# EAGLE board Open Ephys EIB Omnetics 2x32 3 fibers large gold pins (EAGLE 6.3)
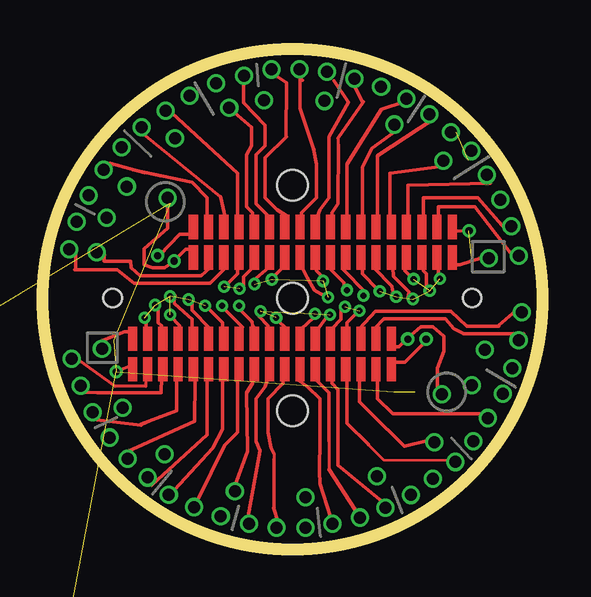
[diagram p0: board, top side]
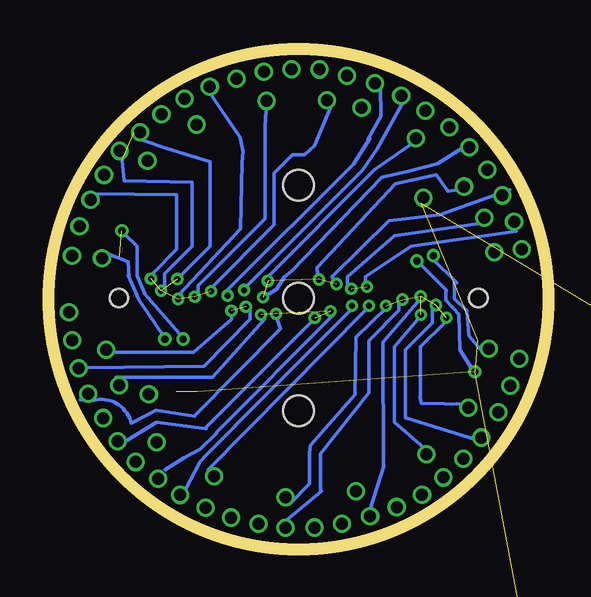
[diagram p1: board, bottom side, seen from below]

No outline drawn. Coordinates in mm, seen from the top.
Copper layers (1*16): Top 0.035mm / dielectric 1.5mm / Bottom 0.035mm
Design rules "default *": minimum track width 5mil, minimum drill 10mil, track to track 6mil, track to pad 6mil, pad to pad 6mil, via to via 6mil, smd to smd 8mil, copper to edge 10mil, drill to drill 8mil, minimum pad ring 5mil, minimum via ring 5mil, stop-mask expansion 4mil, vias tented up to drill 0mil, thermal gap 10mil
Holes 1.27 mm at 11.3,22.99 11.3,27.69 11.3,18.29
Holes 0.76 mm at 3.81,22.99 18.8,22.99
Milling: area 0.9,12.5 to 21.7,33.4

## Footprints (pad centres in the part's own frame; a part is rotated, then mirrored left to right if it is on the bottom)
LARGEGOLDPIN = drill 0.5: P1 0,0

## Placement (x,y rotation side)
E$1  [OMNETICS_36_AA_GS]  12.57,25.31 180 top
E$2  [OMNETICS_36_AA_GS]  10.03,20.66 0 top
E$3  [LARGEGOLDPIN]  1.99,25.02 0 top
E$4  [LARGEGOLDPIN]  3.15,24.9 0 top
E$5  [LARGEGOLDPIN]  2.32,26.17 0 top
E$6  [LARGEGOLDPIN]  3.56,26.34 0 top
E$7  [LARGEGOLDPIN]  2.8,27.27 0 top
E$8  [LARGEGOLDPIN]  4.4,27.64 0 top
E$9  [LARGEGOLDPIN]  3.43,28.34 0 top
E$10  [LARGEGOLDPIN]  4.18,29.28 0 top
E$11  [LARGEGOLDPIN]  6.4,29.66 0 top
E$12  [LARGEGOLDPIN]  5.02,30.1 0 top
E$13  [LARGEGOLDPIN]  6.02,30.8 0 top
E$14  [LARGEGOLDPIN]  7.03,31.42 0 top
E$15  [LARGEGOLDPIN]  8.12,31.95 0 top
E$16  [LARGEGOLDPIN]  8.67,30.91 0 top
E$17  [LARGEGOLDPIN]  9.29,32.25 0 top
E$18  [LARGEGOLDPIN]  10.12,31.24 0 top
E$19  [LARGEGOLDPIN]  10.43,32.52 0 top
E$20  [LARGEGOLDPIN]  11.6,32.53 0 top
E$21  [LARGEGOLDPIN]  12.65,31.2 0 top
E$22  [LARGEGOLDPIN]  12.75,32.41 0 top
E$23  [LARGEGOLDPIN]  15.01,31.8 0 top
E$24  [LARGEGOLDPIN]  13.89,32.12 0 top
E$25  [LARGEGOLDPIN]  16.05,31.3 0 top
E$26  [LARGEGOLDPIN]  17.02,30.65 0 top
E$27  [LARGEGOLDPIN]  15.56,30.22 0 top
E$28  [LARGEGOLDPIN]  17.91,29.9 0 top
E$29  [LARGEGOLDPIN]  6.1,27.16 0 top
E$30  [LARGEGOLDPIN]  18.77,29.12 0 top
E$31  [LARGEGOLDPIN]  17.61,28.71 0 top
E$32  [LARGEGOLDPIN]  19.42,28.12 0 top
E$33  [LARGEGOLDPIN]  20.44,25.98 0 top
E$34  [LARGEGOLDPIN]  20.75,24.75 0 top
E$35  [LARGEGOLDPIN]  19.98,27.09 0 top
E$36  [LARGEGOLDPIN]  3.36,20.88 0 top
E$37  [LARGEGOLDPIN]  2.1,20.46 0 top
E$38  [LARGEGOLDPIN]  2.47,19.33 0 top
E$39  [LARGEGOLDPIN]  4.23,18.42 0 top
E$40  [LARGEGOLDPIN]  2.98,18.23 0 top
E$41  [LARGEGOLDPIN]  3.69,17.18 0 top
E$42  [LARGEGOLDPIN]  5.27,15.51 0 top
E$43  [LARGEGOLDPIN]  5.98,16.49 0 top
E$44  [LARGEGOLDPIN]  6.15,14.8 0 top
E$45  [LARGEGOLDPIN]  7.21,14.28 0 top
E$46  [LARGEGOLDPIN]  8.32,13.9 0 top
E$47  [LARGEGOLDPIN]  8.9,14.94 0 top
E$48  [LARGEGOLDPIN]  9.5,13.59 0 top
E$49  [LARGEGOLDPIN]  19.5,24.65 0 top
E$50  [LARGEGOLDPIN]  10.64,13.43 0 top
E$51  [LARGEGOLDPIN]  11.86,13.41 0 top
E$52  [LARGEGOLDPIN]  11.85,14.68 0 top
E$53  [LARGEGOLDPIN]  12.98,13.59 0 top
E$54  [LARGEGOLDPIN]  14.11,13.85 0 top
E$55  [LARGEGOLDPIN]  15.19,14.26 0 top
E$56  [LARGEGOLDPIN]  14.83,15.57 0 top
E$57  [LARGEGOLDPIN]  16.24,14.79 0 top
E$58  [LARGEGOLDPIN]  17.17,15.46 0 top
E$59  [LARGEGOLDPIN]  18.11,16.16 0 top
E$60  [LARGEGOLDPIN]  17.22,16.98 0 top
E$61  [LARGEGOLDPIN]  18.86,17.02 0 top
E$62  [LARGEGOLDPIN]  19.46,17.99 0 top
E$63  [LARGEGOLDPIN]  20.08,19 0 top
E$64  [LARGEGOLDPIN]  18.79,19.36 0 top
E$65  [LARGEGOLDPIN]  20.74,21.23 0 top
E$66  [LARGEGOLDPIN]  20.88,22.4 0 top
E$67  [LARGEGOLDPIN]  19.34,20.84 0 top
E$68  [LARGEGOLDPIN]  20.47,20.06 0 top
E$69  [LARGEGOLDPIN]  4.44,16.29 0 top
E$70  [LARGEGOLDPIN]  17.55,18.97 0 top

## Library data of the parts
E$1 E$2 = voigts
E$3-E$70 = josh

## Tracks (layer width: path | path; a pad name or v marks a point on that pad's centre or on a via)
S$1  (via drill 0.3)
  other vias: 6.37,24.54
S$2  (via drill 0.25)  (1 unrouted)
  other vias: 8.45,23.47 9.11,23.37
S$3  (via drill 0.3)  (1 unrouted)
  other vias: 18.67,25.8
S$4  (via drill 0.25)  (5 unrouted)
  other vias: 17.46,23.79 16.36,23.78 17.03,23.3 16.33,22.95 15.63,23.04 14.95,23.27
S$5  (via drill 0.25)
  other vias: 14.26,23.09
S$6  (via drill 0.3)
  other vias: 5.69,24.76
S$8
  Top 0.152: 6.1,26.8 6.1,25.91 5.11,25.04 5.11,24.38 5.47,24.25 5.97,24.25 6.34,24.5
S$9  (via drill 0.3)
  other vias: 16.88,21.28
S$10
  Top 0.152: 11.73,24.23 11.9,23.85 12.23,23.32 12.78,23.01
S$11
  Top 0.152: 12.32,24.26 12.32,24.13 12.7,23.75 12.65,23.7
S$12
  Top 0.152: 12.83,24.26 13.46,23.62 13.46,23.37
S$13
  Top 0.152: 13.41,24.18 14.35,23.24
S$14
  Top 0.152: 14.22,24.26 14.22,24 14.86,23.37 14.99,23.37
S$15
  Top 0.152: 10.92,24.26 10.79,24.16 10.54,23.9 10.49,23.8
S$16
  Top 0.152: 10.33,24.27 9.65,23.68 9.83,23.72
S$17  (via drill 0.3)
  other vias: 16.12,21.28
S$18  (via drill 0.25)  (1 unrouted)
  other vias: 14.11,22.46 13.5,22.63
S$19
  Top 0.152: 9.65,24.26 9.27,23.88 9.27,23.37
S$20  (via drill 0.25)
  other vias: 9.08,22.68
S$21
  Top 0.152: 9.02,24.26 9.02,24 8.59,23.57
S$22  (via drill 0.25)
  other vias: 8.37,22.68
S$23  (via drill 0.25)  (5 unrouted)
  other vias: 5.14,22.18 6.21,22.29 5.58,22.7 6.21,23.06 6.97,22.93 7.66,22.68
S$24
  Top 0.152: 8.51,24.26 7.88,23.61 4.71,23.61 3.99,24.18 2.22,24.18
S$25
  Top 0.152: 14.7,24.25 15.46,23.48 15.49,23.24
S$26
  Top 0.152: 7.87,24.26 7.49,23.92 4.95,23.92 4.57,24.26 4.57,24.53
S$27  (via drill 0.25)  (3 unrouted)
  other vias: 9.97,22.44 10.63,22.17 12.25,22.34 12.87,22.3
S$28  (via drill 0.3)  (6 unrouted)
  other vias: 3.96,19.92
S$29
  Top 0.152: 19.21,24.67 18.29,24.38 18.03,24.38
S$30
  Top 0.152: 18.47,25.79 18.03,25.78
S$31
  Top 0.152: 11.05,21.72 10.69,22.07 10.67,22.1
S$32
  Top 0.152: 10.29,21.72 10.29,21.84 9.91,22.23 9.92,22.45
S$33
  Top 0.152: 9.78,21.72 9.65,21.84 9.63,22 9.12,22.5
S$34
  Top 0.152: 9.22,21.77 8.51,22.48
S$35
  Top 0.152: 8.38,21.72 8.38,21.97 7.75,22.61 7.62,22.61
S$36
  Top 0.152: 11.68,21.72 12.18,22.17
S$37
  Top 0.152: 12.34,21.67 12.85,22.36 12.85,22.28
S$38
  Top 0.152: 12.95,21.72 13.34,22.1 13.34,22.61
S$39
  Top 0.152: 13.59,21.72 13.59,21.97 14.02,22.4
S$40
  Top 0.152: 14.1,21.72 14.77,22.44 17.9,22.44 18.57,21.81 19.92,21.82
S$41
  Top 0.152: 7.87,21.72 7.11,22.48 7.11,22.73
S$42
  Top 0.152: 14.73,21.72 15.12,22.12 17.68,22.12 18.03,21.72 18.45,21.5
S$43
  Top 0.152: 3.2,21.16 4.32,21.59 4.57,21.59
S$44  (via drill 0.25)  (3 unrouted)
  other vias: 12.59,23.7 12.79,23.02 10.45,23.77 9.72,23.58
S$45
  Top 0.127: 4.11,20 4.57,20.19
S$46
  Top 0.152: 15.49,20.95 15.75,20.95 16,21.21
S$47
  Top 0.127: 6.4,22.75 6.4,23
  Top 0.152: 7.11,21.72 7.11,22.1 6.4,22.75 | 6.4,23 6.41,23.11
S$48
  Top 0.152: 6.6,21.72 6.6,21.84 6.22,22.23
S$49
  Top 0.152: 5.84,21.72 5.84,21.84 5.71,21.97 5.71,22.48
S$50
  Top 0.152: 5.21,21.72 5.21,22.1
S$51
  Top 0.127: 5.21,19.68 5.19,19.32 3.91,19.32
S$52
  Top 0.152: 5.84,19.68 5.83,19.04
S$53
  Top 0.152: 6.48,19.81 6.48,18.29 4.97,17.73
S$54
  Top 0.152: 7.24,19.56 7.23,17.86 4.41,16.6
S$55
  Top 0.152: 7.75,19.68 7.75,17.29 5.43,15.19
S$56
  Top 0.152: 8.38,19.56 8.38,17.53 7.98,16.74 6.39,15.01
S$57
  Top 0.152: 9.02,19.56 9.02,17.4 8.51,16.89
S$58
  Top 0.152: 9.65,19.68 9.65,19.43 9.4,19.05 9.42,16.61 8.9,15.19
S$59
  Top 0.152: 10.29,19.68 10.16,19.3 9.78,18.8 9.78,17.02 9.96,16.64 9.45,13.89
S$60
  Top 0.127: 10.54,16.51 10.54,16.26
  Top 0.152: 10.92,19.68 10.92,19.43 10.29,18.8 10.29,17.4 10.41,16.76 10.54,16.51
S$61
  Top 0.152: 11.56,19.56 11.94,19.3 12.45,18.8 12.45,17.14
S$62
  Top 0.152: 12.32,19.56 12.83,19.05 12.83,17.02
S$63
  Top 0.127: 12.83,19.68 12.95,19.68
  Top 0.152: 12.95,19.68 12.95,19.43 13.21,19.18 13.21,17.02
S$64
  Top 0.152: 13.59,19.56 13.59,17.78 14.48,16.89
S$65
  Top 0.152: 14.1,19.68 14.1,18.67 15.24,17.53
S$66
  Top 0.152: 14.86,19.56 14.86,18.8 15.49,18.16 19.29,18.16
S$67
  Bottom 0.152: 6.22,18.82 6.22,20.95 5.21,21.97
S$68
  Top 0.152: 9.02,26.42 9.02,28.19 6.27,30.71
S$69
  Top 0.152: 7.11,25.02 6.86,25.02 6.55,24.73
S$70
  Bottom 0.152: 3.89,17.09 6.86,18.01 6.86,20.83 5.71,21.97 5.71,22.61
S$71
  Bottom 0.152: 6.08,16.76 7.3,17.82 7.31,20.96 6.22,22.23
S$72
  Top 0.152: 15.49,24.26 15.52,23.9 16.16,23.26 16.13,22.99 16.26,22.86
S$73
  Top 0.152: 16,24.26 16,24.13 16.38,23.75
S$74
  Top 0.152: 16.76,24.26 16.76,24.13 16.89,24 16.89,23.5
S$75
  Top 0.152: 17.4,24.26 17.4,23.88
S$76
  Top 0.152: 17.4,26.29 17.4,26.79 18.92,26.79
S$77
  Top 0.152: 16.76,26.29 16.77,27.17 19.02,27.17
S$78
  Top 0.152: 16.13,26.16 16.13,27.69 19.57,27.77
S$79
  Top 0.152: 15.37,26.42 15.37,28.19 17.72,28.51
S$80
  Top 0.152: 14.86,26.29 14.86,28.93 17.21,30.47
S$81
  Top 0.152: 14.22,26.42 14.22,28.45 14.63,29.23 15.75,30.04
S$82
  Top 0.152: 13.59,26.42 13.59,28.57 15.03,30.85
S$83
  Top 0.127: 13.23,29.38 13.23,29.69
  Top 0.152: 12.95,26.29 12.95,26.54 13.21,26.92 13.23,29.38
S$84
  Top 0.152: 12.32,26.29 12.45,26.67 12.83,27.18 12.83,29.71 13.65,31.16 13.04,32.05
S$85
  Bottom 0.152: 7.76,16.02 7.78,21.14 6.22,22.97
S$86
  Top 0.152: 11.68,26.29 11.68,26.54 12.32,27.18 12.32,28.57 12.19,29.21
S$87
  Top 0.152: 11.05,26.42 10.67,26.67 10.16,27.18 10.16,28.83 11.05,29.72
S$88
  Top 0.152: 10.29,26.42 9.78,26.92 9.78,28.96 10.16,29.34 10.16,30.19
S$89
  Top 0.127: 9.78,26.29 9.65,26.29
  Top 0.152: 9.65,26.29 9.65,26.54 9.4,26.8 9.4,28.96 9.6,29.34 9.6,30.1 8.73,30.85
S$90
  Top 0.127: 8.31,27.22 4.95,29.94
  Top 0.152: 8.51,26.29 8.31,27.22
S$91
  Top 0.152: 7.75,26.42 7.75,27.18 7.11,27.81 4.65,28.33
S$92
  Bottom 0.152: 10.39,14.94 10.39,16.51 8.38,19.05 8.38,21.21 7.11,22.48 7.11,22.86
S$93
  Bottom 0.152: 19.9,27.33 16.38,27.3 16.38,25.02 17.4,24
S$94  (1 unrouted)
  Bottom 0.152: 18.65,28.74 18.58,27.88 15.74,27.81 15.75,25.15 16.89,24 16.89,23.37
S$95
  Bottom 0.152: 17.8,29.57 16.83,29.22 14.99,28.68 14.99,25.15 16.38,23.75
S$96
  Bottom 0.152: 15.1,31.68 13.74,29.69 13.61,29.11 13.65,28.63 13.73,25.89 16.33,23.08
S$97
  Bottom 0.152: 12.65,30.82 12.7,30.11 12.7,28.45 12.7,26.29 15.49,23.5 15.49,23.11
S$98
  Bottom 0.152: 9.82,31.27 10.64,29.34 11.05,28.96 11.56,28.96 12.32,28.19 12.32,26.04 14.99,23.37
S$99
  Bottom 0.152: 8.33,29.66 9.02,28.57 14.33,23.27
S$100
  Bottom 0.152: 6.89,31.25 8.04,29.18 8.64,28.32 13.59,23.37
S$101
  Bottom 0.152: 6.43,29.52 8.13,28.34 12.7,23.75 12.62,23.67
S$102
  Bottom 0.152: 4.46,29.25 5.51,28.58 6.72,28.28 7.83,28.03 11.61,24.11 11.89,23.89 12.22,23.36 12.78,23.01
S$103
  Top 0.152: 7.11,25.65 6.6,25.65 5.76,24.78
S$104
  Bottom 0.152: 11.67,14.4 10.85,15.25 10.85,16.55 10.8,16.86 8.96,18.97 8.92,21.36 7.62,22.61
S$105
  Bottom 0.152: 2.22,25.77 6.62,25.14 8.51,23.88 8.51,23.62
S$106
  Bottom 0.152: 3.67,26.11 7.31,25.59 9.27,23.88 9.27,23.37
S$107
  Bottom 0.152: 10.49,23.8 10.54,24.26 7.27,27.75 5.55,28.13 5.08,27.44 4.37,27.55
S$108
  Bottom 0.152: 2.5,27.5 5.41,26.46 7.53,26.2 9.91,23.88 9.83,23.72
S$109
  Bottom 0.152: 15.09,15.84 8.51,22.48
S$110
  Bottom 0.152: 13.97,17.65 9.02,22.61
S$111
  Bottom 0.152: 14.73,17.4 9.91,22.23 9.91,22.48
S$112
  Bottom 0.152: 12.24,22.23 12.06,21.72 15.65,18.08
S$113
  Top 0.152: 15.49,20.32 16,20.32 16.89,21.21
S$114
  Bottom 0.152: 19.13,20.73 15.68,20.73 14.1,22.1 14.1,22.35
S$115
  Bottom 0.152: 20.24,20.09 15.24,20.16 13.34,22.1 13.34,22.61
S$116
  Bottom 0.152: 10.64,22.1 10.66,22.1 15.2,17.57
S$117
  Bottom 0.152: 18.91,19.69 16.41,19.7 14.88,19.7 12.73,22.1 12.85,22.25
S$119
  Bottom 0.152: 6.33,24.5 5.14,23.32
S$120
  Bottom 0.152: 5.71,24.64 4.7,23.62
S$121
  Bottom 0.152: 18.03,23.95 18.03,25.15 18.55,25.65 18.62,25.74
S$122
  Bottom 0.152: 18.38,23.86 18.41,24.51 19.26,24.85
S$123  (via drill 0.25)
  other vias: 13.58,23.32
S$124
  Top 0.152: 17.35,19.18 17.35,20.07 17.62,20.77 17.62,21.41 17.17,21.8 16.66,21.8 16.13,21.34
S$125
  Bottom 0.152: 16.13,21.34 17.73,23.19
S$126
  Bottom 0.152: 16.89,21.34 17.95,22.9 18.41,23.94
S$127
  Bottom 0.152: 5.16,22.89 4.63,22.32 4.57,20.83 4.07,20.05 4.13,20.19
S$128
  Bottom 0.152: 4.8,22.96 4.29,22.45 4.2,21.43 3.71,20.86
S$129
  Bottom 0.152: 17.73,23.18 18.04,23.92
S$130
  Bottom 0.152: 5.17,23.33 5.17,22.91
S$131
  Bottom 0.152: 4.8,22.96 4.8,23.67
S$133
  Top 0.152: 2.27,24.27 2.27,24.97
S$134
  Top 0.152: 4.56,24.53 3.46,24.53 3.45,24.94
S$135
  Top 0.127: 5.78,28.08 5.14,28.22
  Top 0.152: 5.14,28.22 3.71,28.6
S$136
  Bottom 0.152: 8.4,29.6 7.87,30.56 7.89,31.79
S$137
  Top 0.152: 10.16,30.19 9.28,31.12 9.28,31.83
S$139
  Top 0.152: 11.04,29.72 11.06,31.96 10.55,32.29
S$140
  Top 0.127: 12.21,29.2 12.19,29.22
  Top 0.152: 12.19,29.22 11.63,30.9 11.63,32.18 11.73,32.07
S$141
  Top 0.152: 14.22,31.16 13.83,31.94
S$142
  Bottom 0.152: 19.07,28.16 arc90 19.13,28.23
S$143
  Top 0.127: 3.91,19.31 3.9,19.33 2.25,20.52
S$144
  Top 0.152: 5.83,19.05 3.17,19.05 2.61,19.07
S$145
  Top 0.127: 5.79,18.04 5,17.69
  Top 0.152: 5,17.69 2.95,17.93
S$146
  Bottom 0.152: 6.24,18.87 6.19,18.61 4.23,18.57 4.71,18.58
S$147
  Top 0.152: 10.52,14.25 10.7,13.67
S$148
  Top 0.152: 8.48,16.86 7.35,14.56
S$149
  Bottom 0.152: 7.75,16 8.3,14.23
S$150
  Top 0.152: 18.92,26.79 20.59,24.62
S$151
  Bottom 0.152: 17.23,17.82 18.45,17.07
S$152
  Top 0.152: 10.54,16.28 10.54,15.48 10.53,14.24
S$153
  Bottom 0.152: 15.63,18.07 17.24,18.32 18.28,17.77 arc-90 19.84,18.74 20.41,18.76
S$154
  Bottom 0.152: 10.36,14.93 11.78,13.76
S$155
  Top 0.152: 12.45,17.16 12.43,15.77 12.45,15.24 12.9,13.88
S$156
  Top 0.127: 12.84,17 12.84,15.87
  Top 0.152: 12.84,15.87 13.93,14.14
S$157
  Top 0.152: 13.2,17 13.2,16.02 15.05,14.5
S$159
  Bottom 0.152: 13.95,17.65 15.17,16.43 15.41,16.17 16.01,15.03
S$160
  Bottom 0.152: 14.73,17.37 15.4,16.69 16.09,16.33 16.88,15.85
S$161
  Top 0.127: 14.47,16.87 15.09,16.26 17.82,16.24
S$162
  Top 0.152: 15.3,17.5 15.97,16.82 17,17.07
S$163
  Bottom 0.152: 15.16,17.54 17.23,17.82
S$165
  Top 0.152: 19.92,21.85 20.65,22.48
S$166
  Top 0.152: 18.43,21.5 20.96,21.5
S$167
  Top 0.152: 19.04,27.17 20.18,25.87
S$169
  Top 0.152: 15.02,30.85 15.97,31.18
S$170
  Top 0.152: 13.2,29.66 14.26,31.18

## Text on the board
tDocu: eib 64